# Allegro board AMPLFICATOR AUDIO PUTERE.brd
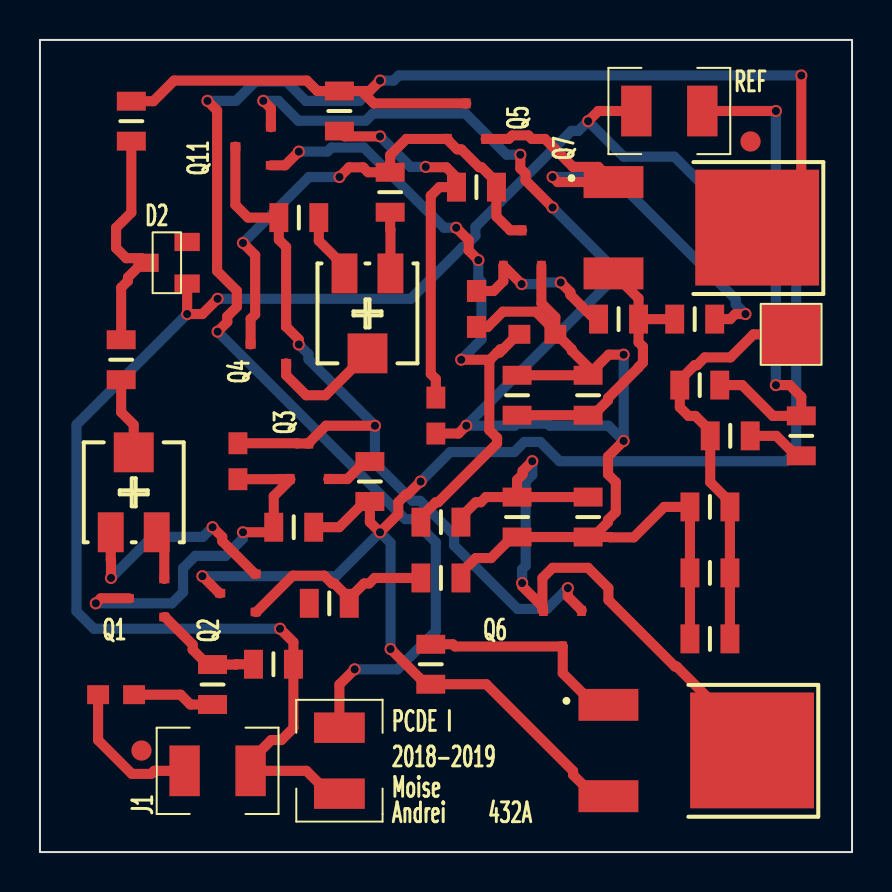
[diagram p0: board, top side]
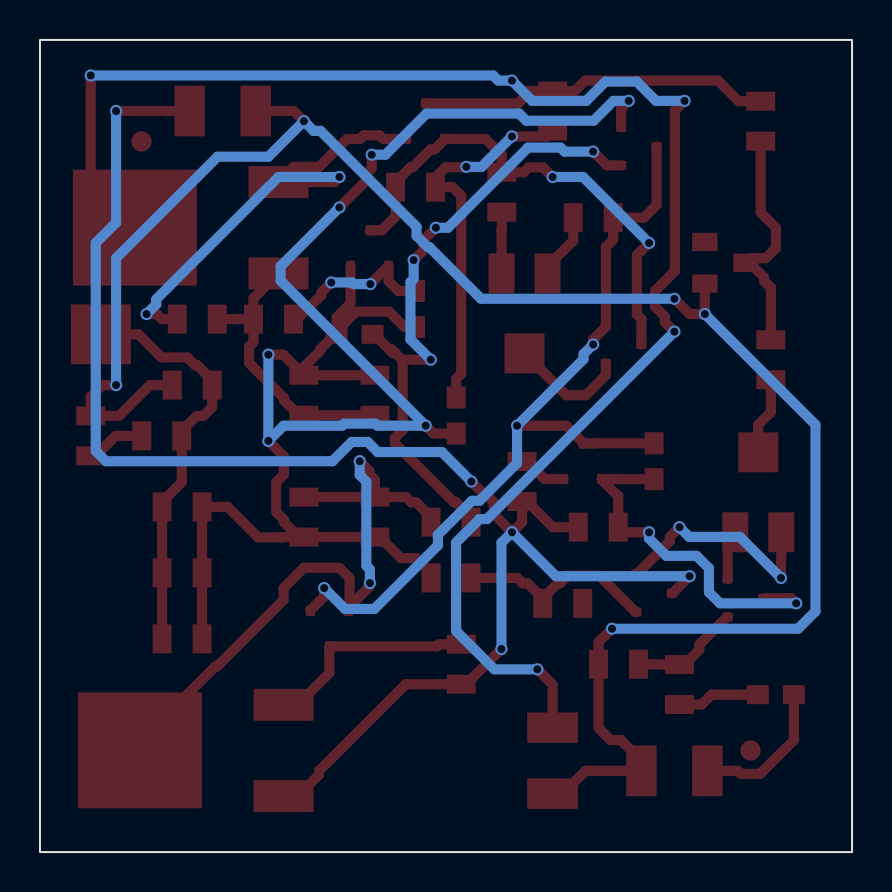
[diagram p1: board, bottom side, seen from below]

Outline 40.64 x 40.64 mm; copper layers: TOP, BOTTOM. Coordinates in mm from the lower left corner of the outline.
Outline path: rectangle 0,0 40.64,40.64

## Design rules (mm)
nets with their own width: min track width 0.508; nets +15 -15 GND N70503 N70523 N70569 N70777 N70781 N70785 N70791 N70935 N70961 N70965 N70999 N71103 N71109 N71187 N71409 N71415 N71651 N75743 N77321 N78241 N85441 N85447 N85741 N705812 N709490 N717790

## Placement (name value [footprint] x y rotation side)
C1  47p  [CAPC2008X126N_0805]  9.91 19.56 90 top
C2  4.7u  [CAPC2008X126N_0805]  3.81 7.87 0 top
C4  4.7u  [CAPC2008X126N_0805]  19.81 21.84 90 top
C5  1n  [CAPC2008X126N_0805]  21.84 27.18 90 top
C6  1n  [CAPC2008X126N_0805]  24.89 25.91 0 top
D2  BZX84-C8V2  [TO236AB]  7.37 28.45 0 top
J1  CON2  [1210RF_WV_12D]  8.89 4.06 0 top
J2  CON2  [1210RF_WV_12D]  14.99 4.57 270 top
J3  CON2  [1210RF_WV_12D]  31.5 37.08 180 top
J6  CON1  [TEST_PAD]  37.59 25.91 180 top
NOREF  -  []  0 40.64 0 top
NOREF#2  -  []  40.64 0 90 top
NOREF#3  Value  [unnamed#2]  5.08 5.08 0 top
Q1  QBC856B  [SOT23]  5.33 12.7 180 top
Q2  QBC856B  [SOT23]  9.91 12.95 180 top
Q3  QBC817-25  [SOT23]  13.46 19.56 90 top
Q4  QBC846B  [SOT23]  11.43 25.4 180 top
Q5  QBC846B  [SOT23]  21.34 36.58 90 top
Q6  QBC856B  [SOT23]  26.16 11.18 270 top
Q7  QMJD31C  [DPACK]  28.7 33.53 270 top
Q8  QMJD31C  [DPACK]  28.45 7.37 270 top
Q10  QBC846B  [SOT23]  24.13 30.23 90 top
Q11  QBC856B  [SOT23]  10.67 35.31 180 top
R1A  330  [RES2012X50N_0805]  17.53 33.02 90 top
R1B  330  [RES2012X50N_0805]  12.95 31.75 0 top
R3  1k  [RES2012X50N_0805]  28.96 26.67 0 top
R5  2.2k  [RES2012X50N_0805]  8.64 8.38 90 top
R6  47k  [RES2012X50N_0805]  11.68 9.4 180 top
R7  1.5k  [RES2012X50N_0805]  4.57 36.58 90 top
R8  15k  [RES2012X50N_0805]  4.06 24.64 270 top
R9  500  [TS53YJ]  5.84 16 270 top
R10  4.7k  [RES2012X50N_0805]  14.48 12.45 0 top
R11  5.6k  [RES2012X50N_0805]  12.7 16.26 180 top
R12  910  [RES2012X50N_0805]  14.99 37.08 90 top
R13  1k  [RES2012X50N_0805]  21.84 33.27 0 top
R14  2k  [TS53YJ]  15.24 28.96 90 top
R15  33  [RES2012X50N_0805]  16.51 18.54 90 top
R16  1k  [RES2012X50N_0805]  20.07 16.51 0 top
R26  33  [RES2012X50N_0805]  32.77 26.67 0 top
R27  33  [RES2012X50N_0805]  19.56 9.4 90 top
R28A  0.47  [RES2012X50N_0805]  27.43 22.86 270 top
R28B  0.47  [RES2012X50N_0805]  23.88 22.86 270 top
R29A  0.47  [RES2012X50N_0805]  27.43 16.76 270 top
R29B  0.47  [RES2012X50N_0805]  23.88 16.76 270 top
R30A  0.47  [RES2012X50N_0805]  33.53 13.97 0 top
R30B  0.47  [RES2012X50N_0805]  33.53 10.67 0 top
R30C  0.47  [RES2012X50N_0805]  33.53 17.27 0 top
R31  47k  [RES2012X50N_0805]  20.07 13.72 180 top
REF  -  [unnamed#2]  35.56 35.56 0 top
RS1  51  [RES2012X50N_0805]  33.02 23.37 180 top
RS2  4.7  [RES2012X50N_0805]  34.54 20.83 180 top
RS3  4.7  [RES2012X50N_0805]  38.1 20.83 270 top

## Library data of the parts
C1 C2 C4-C6 = C
D2 = BZX84-C8V2_1
J1-J3 = CON2
J6 = CON1
Q1 Q2 Q6 Q11 = QBC856B_1
Q3 = QBC817-25_0
Q4 Q5 Q10 = QBC846B_0
Q7 Q8 = QMJD31C_0
R1A R1B R3 R5-R8 R10-R13 R15 R16 R26 R27 R28A R28B R29A R29B R30A R30B R30C R31 RS1-RS3 = R
R9 R14 = POT

## Footprints (pads in the part's own frame, mm; a bottom-side part is the same pattern mirrored in y, then rotated)
1210RF_WV_12D
  rect 1.524x2.54 smd: 1(-1.651,0) 2(1.651,0)
CAPC2008X126N_0805
  rect 1.1x0.95 smd: 1(-0.9,0) 2(0.9,0)
DPACK
  rect 1.6x3 smd: 1(0,0) 3(4.57,0)
  rect 5.8x6.2 smd: 2(2.28,7.19)
RES2012X50N_0805
  rect 0.95x1.45 smd: 1(-1,0) 2(1,0)
SOT23
  rect 0.508x0.432 smd: 1(-0.889,0.94) 2(-0.889,-0.965) 3(0.889,0)
TEST_PAD
  rect 3x3 smd: 1(0,0)
TO236AB
  rect 1.27x0.914 smd: 1(0,0) 2(0,2.083) 3(-2.057,1.041)
TS53YJ
  rect 2x1.3 smd: 1(0,0) 3(0,-2.3)
  rect 2x2 smd: 2(-4,-1.15)
unnamed#2
  round 1.016 smd: 1(0,0)

## Nets
GND: D2.1(A) J1.2 J2.2 J3.2 R6.1 RS1.1 RS3.1
+15: J2.1 Q5.3(C) Q7.2(C) R7.2 R12.2
-15: J3.1 Q2.3(C) Q8.3(E) R11.1 R15.1 R27.1
N70503: Q4.3(C) Q5.1(B) Q10.3(C) R1A.2 R13.2
N70523: C1.2 Q3.3(C) Q4.2(E) Q6.1(B) Q11.3(C) R1B.1
N70569: Q1.1(B) R5.2 R6.2
N70777: Q2.1(B) R10.2 R31.2
N70781: C1.1 Q1.3(C) Q3.1(B) R11.2
N70785: Q2.2(E) R9.3(2)
N70791: Q1.2(E) R9.1
N70935: Q6.2(E) Q8.2(C) R16.2 R29A.1 R29B.1
N70961: C4.1 C5.1 C6.2 Q10.2(E) Q11.2(E) R28A.1 R28B.1 R29A.2 R29B.2 R30A.1 R30B.1 R30C.1 R31.1
N70965: Q7.3(E) R3.2 R26.1 R28A.2 R28B.2
N70999: Q5.2(E) Q7.1(B) R26.2
N71103: D2.3(C) R7.1 R8.1
N71109: C4.2 R12.1 R13.1
N71187: J6.1 R30A.2 R30B.2 R30C.2 RS1.2 RS2.2
N71409: C6.1 Q11.1(B) R16.1
N71415: C5.2 Q10.1(B) R3.1
N71651: Q6.3(C) Q8.1(B) R27.2
N75743: R1B.2 R14.1
N77321: R1A.1 R14.3(2)
N78241: RS2.1 RS3.2
N85441: C2.2 R5.1
N85447: C2.1 J1.1
N85741: R10.1
N705812: R8.2 R9.2(T)
N709490: Q3.2(E) R15.2
N717790: Q4.1(B) R14.2(T)

Pads without a net: D2 2; NOREF#3 1; REF 1

## Via types
v1: diameter 0.61, hole 0.406, TOP to BOTTOM, 42 vias

## Routing (per net, layer and track width the routed paths; a pad name or vN(x,y) marks a point on that pad's centre or on a via; arc(x,y) is an arc through that point)
GND: length 95.5
  TOP w0.508: J3.2 27.94,37.08 v1(27.43,36.58) ; 14.99,2.92 14.48,2.92 13.34,4.06 J1.2 10.54,4.57 11.57,5.6 12.08,5.6 12.68,6.21 R6.1 12.68,10.5 v1(12.01,11.18) ; D2.1 v1(7.37,26.92) 8.13,26.92 v1(8.89,27.69) ; v1(36.83,23.37) 37.52,23.37 38.1,22.78 RS3.1 36.68,21.83 35.14,23.37 RS1.1
  BOTTOM w0.508: v1(12.01,11.18) 2.7,11.18 1.83,12.05 1.83,21.39 v1(7.37,26.92) ; v1(36.83,23.37) 36.83,29.72 31.75,34.8 29.21,34.8 v1(27.43,36.58) 26.95,36.09 26.6,36.09 21.79,31.29 21.79,30.84 21.23,30.28 21.16,30.28 18.57,27.69 v1(8.89,27.69)
+15: length 98.8
  TOP w0.508: 16.09,38.08 R12.2 13.88,38.08 13.36,38.61 6.71,38.61 5.68,37.58 R7.2 ; 16.09,38.08 16.49,38.08 v1(17.02,38.61) ; 16.09,38.08 16.71,37.47 Q5.3 ; v1(8.89,26.04) 9.38,26.53 9.38,26.81 9.86,27.29 9.86,28.09 8.86,29.08 8.86,37.11 v1(8.38,37.59) ; v1(15.75,9.14) 14.99,8.38 J2.1 ; Q7.2 38.1,33.46 v1(38.1,38.86)
  BOTTOM w0.508: v1(8.89,26.04) 18.27,16.66 18.64,16.66 19.81,15.49 19.81,11.06 17.9,9.14 v1(15.75,9.14) ; v1(38.1,38.86) 17.96,38.86 17.7,38.61 v1(17.02,38.61) 16,37.59 13.3,37.59 12.34,38.56 10.78,38.56 9.81,37.59 v1(8.38,37.59)
-15: length 81
  TOP w0.508: R11.1 14.97,16.26 16.26,17.54 R15.1 16.51,16.51 v1(17.02,16) 17.93,16.91 17.93,17.51 18.32,17.9 18.4,17.9 v1(19.05,18.54) ; v1(17.55,10.16) 19.31,8.4 R27.1 22.34,8.4 26.68,4.06 26.68,3.87 27.75,2.8 Q8.3 ; 9.02,12.95 8.98,12.95 v1(8.13,13.8) ; J3.1 v1(36.83,37.08)
  BOTTOM w0.508: v1(17.55,10.16) 17.55,15.47 v1(17.02,16) 14.82,13.8 v1(8.13,13.8) ; v1(36.83,37.08) 36.83,31.5 37.85,30.48 37.85,20.07 37.34,19.56 26,19.56 25.04,20.52 24.24,20.52 23.73,20.02 20.52,20.02 v1(19.05,18.54)
N70503: length 25.2
  TOP w0.508: Q10.3 23.53,31.11 22.84,31.8 R13.2 22.84,33.52 22.1,34.27 21.98,34.27 21.09,35.16 20.88,35.16 20.4,35.65 Q5.1 18.34,35.69 17.53,34.88 R1A.2 16.42,34.02 16.17,34.27 15.47,34.27 v1(14.99,33.78) ; v1(10.16,30.48) 10.77,29.87 10.77,26.91 10.54,26.68 Q4.3
  BOTTOM w0.508: v1(14.99,33.78) 13.46,33.78 v1(10.16,30.48)
N70523: length 41.7
  TOP w0.508: Q11.3 9.78,32.38 10.41,31.75 R1B.1 11.95,30.64 12.32,30.28 12.32,26.29 12.95,25.65 v1(12.95,25.4) ; v1(16.76,21.34) 14.31,21.34 13.46,20.49 Q3.3 12.87,20.45 12.85,20.46 C1.2 ; Q6.1 27.1,12.1 26.42,12.79 v1(26.42,13.21)
  BOTTOM w0.508: v1(12.95,25.4) 13.44,24.91 13.44,24.66 v1(16.76,21.34) 16.76,19.46 18.65,17.58 19.02,17.58 20.73,15.87 20.73,15.34 23.91,12.16 25.37,12.16 v1(26.42,13.21)
N70569: length 5.6
  TOP w0.508: R6.2 9.83,9.4 9.81,9.38 R5.2 8.39,9.38 7.64,10.13 7.64,10.38 6.26,11.76 Q1.1
N70777: length 10.2
  TOP w0.508: Q2.1 10.83,12.01 12.65,13.83 14.23,13.83 14.62,13.44 14.73,13.44 15.48,12.7 ; 15.48,12.7 16.22,13.44 16.47,13.44 16.75,13.72 R31.2 ; 15.48,12.7 R10.2
N70781: length 18.5
  TOP w0.508: v1(2.79,12.45) 3.05,12.7 Q1.3 ; v1(10.16,16) 11.45,16 R11.2 11.7,17.81 12.52,18.63 Q3.1 11.93,18.67 11.91,18.66 C1.1
  BOTTOM w0.508: v1(10.16,16) 10.16,15.69 9.29,14.82 7.78,14.82 7.16,14.2 7.16,13 6.6,12.45 v1(2.79,12.45)
N70785: length 11.7
  TOP w0.508: v1(3.56,13.72) 3.56,14.61 3.54,14.62 R9.3 ; v1(8.64,16.26) 9.12,15.77 9.12,15.55 10.76,13.92 Q2.2
  BOTTOM w0.508: v1(8.64,16.26) 8.15,15.77 5.61,15.77 v1(3.56,13.72)
N70791: length 2.5
  TOP w0.508: R9.1 6.22,15.62 Q1.2
N70935: length 33.8
  TOP w0.508: 25.15,12.29 24.13,13.31 v1(24.13,13.46) ; 25.15,12.29 25.15,12.12 Q6.2 ; 25.15,12.29 25.15,13.72 25.65,14.22 27.43,14.22 28.45,13.21 28.45,12.61 31.78,9.28 31.87,9.28 35.64,5.51 Q8.2 ; R29A.1 R29B.1 ; R29B.1 23.88,18.62 24.15,18.9 24.15,19.07 v1(24.64,19.56) ; R29B.1 22.32,17.76 22.06,17.5 21.81,17.5 21.07,16.76 R16.2
  BOTTOM w0.508: v1(24.13,13.46) 24.13,14.15 24.31,14.32 24.31,18.54 24.64,18.87 v1(24.64,19.56)
N70961: length 90.9
  TOP w0.508: R28A.1 28.46,24.89 v1(29.21,24.89) ; R28A.1 R28B.1 ; R28A.1 27.43,24.27 26.61,25.09 26.61,25.16 25.87,25.91 C6.2 25.79,26.07 ; v1(25.65,32.26) 24.3,33.61 24.3,33.95 24.04,34.21 v1(24.04,34.9) ; 25.79,26.07 24.82,27.04 23.17,27.04 22.4,26.28 C5.1 ; 25.79,26.07 25.79,26.76 25.1,27.46 Q10.2 ; 27.68,15.76 R29A.2 R29B.2 23.63,15.76 22.57,14.71 21.81,14.71 21.07,13.97 R31.1 ; 27.68,15.76 28.54,15.76 28.55,15.75 29.72,15.75 31.24,17.27 R30C.1 R30A.1 R30B.1 ; 27.68,15.76 28.43,16.51 28.43,16.62 28.82,17.02 28.82,18.51 28.43,18.9 28.43,19.79 v1(29.21,20.57) ; v1(11.18,37.59) 11.56,37.21 Q11.2 ; C4.1 20.94,20.94 v1(21.34,21.34)
  BOTTOM w0.508: v1(29.21,24.89) v1(29.21,20.57) 28.45,21.34 25.52,21.34 25.42,21.44 23.86,21.44 23.76,21.34 v1(21.34,21.34) 28.6,28.6 28.6,29.32 v1(25.65,32.26) ; v1(11.18,37.59) 11.94,37.59 12.93,36.6 16.3,36.6 16.66,36.96 21.29,36.96 23.35,34.9 v1(24.04,34.9)
N70965: length 14.4
  TOP w0.508: R26.1 R3.2 ; R3.2 29.96,25.51 30.18,25.29 30.18,24.49 29.96,24.27 29.96,24.25 28.43,22.72 28.43,22.6 27.68,21.86 R28A.2 R28B.2 ; R3.2 29.96,27.7 Q7.3
N70999: length 24.9
  TOP w0.508: v1(35.31,26.92) 34.8,26.92 34.54,26.67 R26.2 ; Q5.2 23.46,35.69 23.64,35.86 24.44,35.86 24.62,35.69 25.27,35.69 26.67,34.29 27.94,34.29 Q7.1 25.91,33.53 v1(25.65,33.78)
  BOTTOM w0.508: v1(35.31,26.92) 34.82,27.41 34.82,27.66 28.7,33.78 v1(25.65,33.78)
N71103: length 11.9
  TOP w0.508: R7.1 4.57,32 3.81,31.24 3.81,30.23 4.32,29.72 5.08,29.72 D2.3 5.13,29.49 4.4,28.76 4.4,28.58 4.06,28.24 R8.1
N71109: length 19
  TOP w0.508: v1(19.3,34.29) 19.33,34.27 20.34,34.27 20.84,33.76 R13.1 19.99,33.27 19.56,32.84 19.56,23.93 19.81,23.68 C4.2 ; R12.1 15.26,35.81 v1(17.02,35.81)
  BOTTOM w0.508: v1(17.02,35.81) 18.54,34.29 v1(19.3,34.29)
N71187: length 20.7
  TOP w0.508: J6.1 35.71,25.91 34.56,24.75 33.27,24.75 32.88,24.36 32.76,24.36 32.02,23.62 RS1.2 32.02,22.26 32.46,21.82 32.8,21.82 33.54,21.08 RS2.2 33.54,18.51 34.53,17.52 R30C.2 R30A.2 R30B.2
N71409: length 32.6
  TOP w0.508: 22.88,25 22.52,24.64 ; 22.88,25 23.05,25.16 23.17,25.16 ; 22.88,25 23,25 23.17,25.16 ; 22.52,24.64 22.49,24.61 22.49,21.11 22.88,20.72 22.88,20.46 19.93,17.5 19.81,17.5 19.07,16.76 R16.1 ; 22.52,24.64 v1(21.08,24.64) ; v1(20.83,31.24) 21.45,30.62 21.45,30.11 v1(21.94,29.62) ; 23.17,25.16 23.92,25.91 C6.1 ; v1(12.95,35.05) 12.27,34.37 Q11.1
  BOTTOM w0.508: v1(21.08,24.64) 22.1,25.65 22.1,28.52 21.94,28.68 v1(21.94,29.62) ; v1(12.95,35.05) 14.38,35.05 14.59,35.26 16.21,35.26 20.22,31.24 v1(20.83,31.24)
N71415: length 8.3
  TOP w0.508: v1(24.1,28.42) Q10.1 23.19,28.57 22.7,28.08 C5.2 ; R3.1 27.76,26.67 26.55,27.88 26.55,28.02 v1(26.06,28.5)
  BOTTOM w0.508: v1(26.06,28.5) 25.01,28.5 24.93,28.42 v1(24.1,28.42)
N71651: length 10.9
  TOP w0.508: R27.2 20.66,10.4 20.78,10.29 Q6.3 26.16,8.95 27.75,7.37 Q8.1
N75743: length 3.3
  TOP w0.508: R14.1 15.24,29.31 13.95,30.59 R1B.2
N77321: length 3.1
  TOP w0.508: R1A.1 17.53,31.16 17.54,31.15 R14.3
N78241: length 3
  TOP w0.508: RS2.1 36.85,20.83 37.85,19.83 RS3.2
N85441: length 4.1
  TOP w0.508: R5.1 7.53,7.38 7.04,7.87 C2.2
N85447: length 7.4
  TOP w0.508: J1.1 5.72,4.06 5.56,3.91 4.6,3.91 2.91,5.6 C2.1
N705812: length 3.9
  TOP w0.508: R9.2 4.69,21.38 4.06,22.01 R8.2
N709490: length 2.4
  TOP w0.508: R15.2 16.26,19.54 15.39,18.67 Q3.2
N717790: length 6
  TOP w0.508: 12.32,24.46 12.32,23.86 13.32,22.86 14.29,22.86 R14.2

## Text on the board
Ref Des/Silkscreen Top: PCDE I | 2018-2019 | Moise | Andrei | 432A
XSECTION_CHART: *  SURFACE - AIR 0 MIL | L1: TOP CONDUCTOR - COPPER 0.7 MIL | *  DIELECTRIC - FR-4 54.65 MIL | L2: BOTTOM CONDUCTOR - COPPER 0.7 MIL | DESIGN CROSS SECTION CHART | ___________________________ | TOTAL THICKNESS 56.05 MIL | 1-2
DIMENSION: FIGURE | SIZE | 16.0 | DRILL CHART: TOP to BOTTOM | ALL UNITS ARE IN MILS | PLATED | QTY | 42
